# Altium PCB solarlipocharger.PcbDoc
Units mm, origin at the board's own origin, x right, y up, seen from the top; angles counter-clockwise.
Board outline 52.7 x 22.73 mm, 2 copper layers (Top Layer, Bottom Layer); 23 components, 14 nets, 67 pads, 111 vias.
Unrouted connection lines stored in the file: 15.
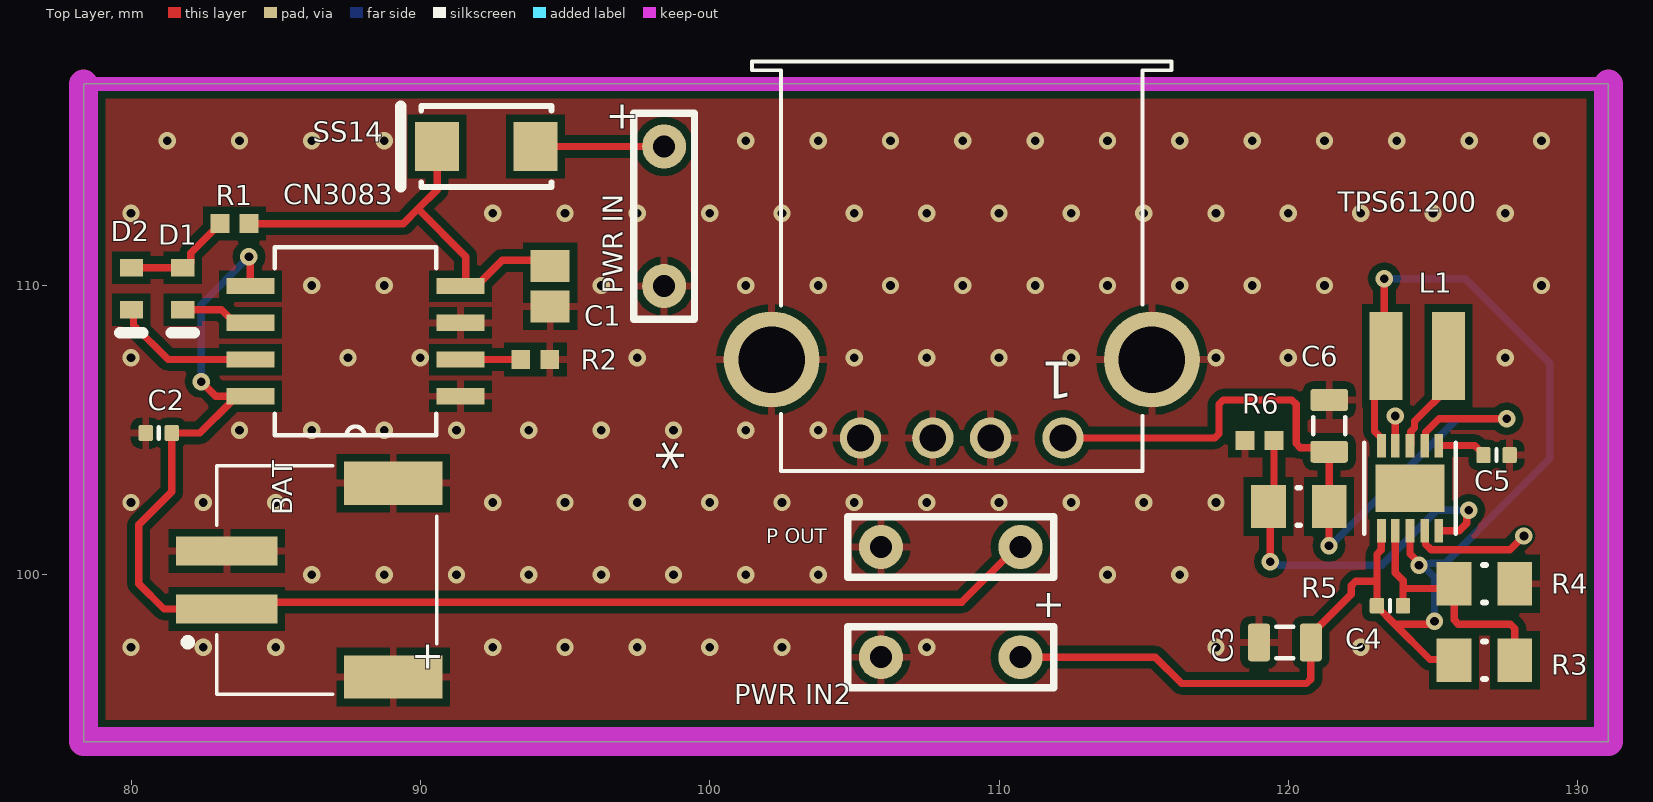
[diagram p0: Top Layer view]
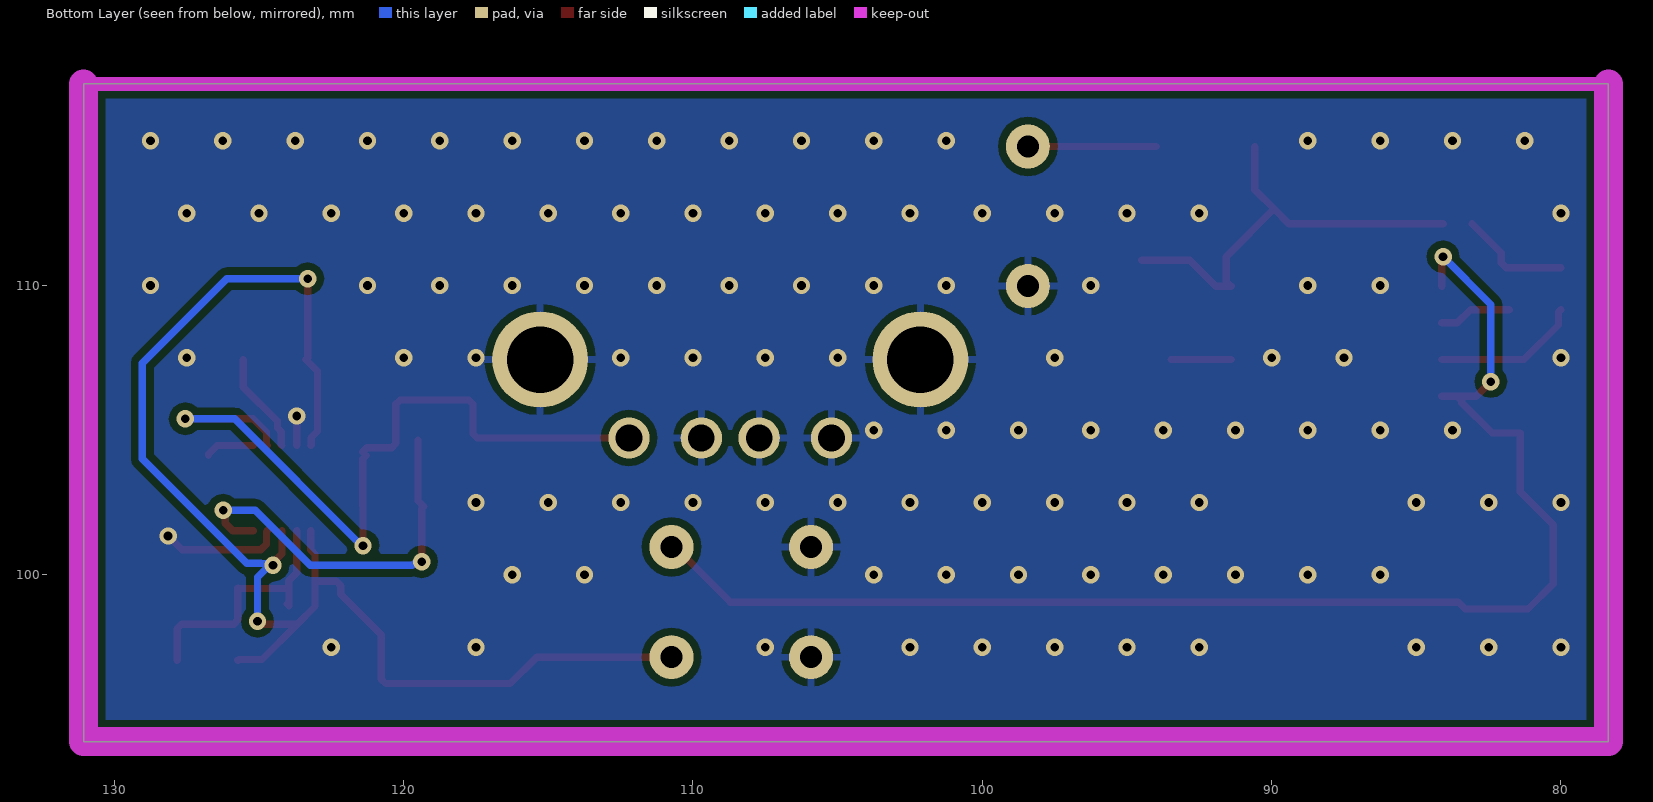
[diagram p1: Bottom Layer view, seen from below]
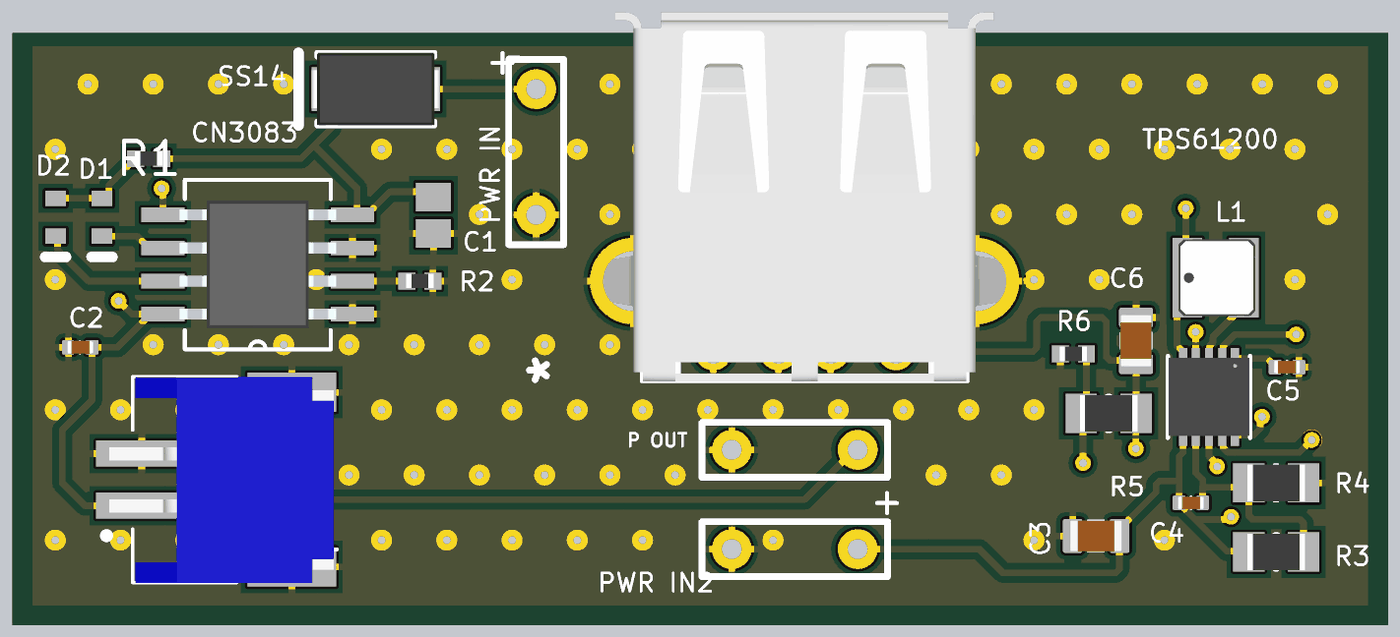
[diagram p2: 3D render of the assembled board from above, using the file's embedded part models]

## Layer stack, top to bottom
Top Solder: solder mask 0.0102, Solder Resist, Dk 3.5
Top Layer: signal copper 0.0356
Dielectric 1: dielectric 0.32, FR-4, Dk 4.8
Bottom Layer: signal copper 0.0356
Bottom Solder: solder mask 0.0102, Solder Resist, Dk 3.5

## Board outline
78.359,94.234 131.064,94.234 131.064,116.967 78.359,116.967

## Design rules (kind name [scope] priority, off if disabled: settings)
Clearance [All] p1: gap=0.254 ignorepadtopadclearanceinfootprint=FALSE except(0: Arc-Hole Track-Hole SMDPad-Hole THPad-Hole Via-Hole Fill-Hole Poly-Hole Region-Hole Text-Hole; 0.127: Arc-Arc Arc-Track Arc-SMDPad Track-Track Track-SMDPad SMDPad-SMDPad)
PolygonConnect [All] p1: connectstyle=Relief reliefconductorwidth=0.254 reliefentries=4 polygonreliefangle="90 Angle" airgapwidth=0.254
RoutingVias [All] p1: holewidth=0.3 width=1.27 viastyle="Through Hole" minholewidth=0.3 minwidth=0.6 maxholewidth=0.711 maxwidth=0.6
SolderMaskExpansion [All] p1: expansion=0.102 istentingtop=FALSE
Width [All] p1: maxlimit=0.254 minlimit=0.254 preferedwidth=0.254
30 further rules are at their usual default settings.

## Components (designator, comment, footprint, x,y, rotation, side; value= is the part's Value field where it differs from the comment)
* "USB A FEMALE" "USB A FEMALE" 108.585,111.76 r180 top
BAT "BAT" BAT 87.122,99.822 r90 top
C1 "08056D226MAT2A" CAPC2013X140X50LL20T25 94.488,109.971 r270 top
C2 "4.7 uF" "CAPACITOR 0402" 80.957,104.902 r180 top
C3 "10 uF" "CAPACITOR 0805" 119.877,97.663 r180 top
C4 "0.1 uF" "CAPACITOR 0402" 123.513,98.933 r0 top
C5 "0.1 uF" "CAPACITOR 0402" 127.196,104.14 r0 top
C6 "22 uF" "CAPACITOR 0805" 121.412,105.155 r90 top
CN3083 "CN3038" CN3083 87.757,108.204 r180 top
D1 "GREEN" "DIODE 0603" 81.788,109.892 r270 top
D2 "RED" "DIODE 0603" 80.01,109.892 r270 top
L1 "4.7 uF 1.2A" LPS3015 124.46,107.569 r0 top
"P OUT" "PWR OUT" PWR 108.331,100.965 r180 top
"PWR IN" "SOLAR PWR IN" PWR 98.425,112.395 r270 top
"PWR IN2" "BAT IN" PWR 108.331,97.155 r180 top
R1 "330" "RESISTOR 0402" 83.574,112.141 r180 top
R2 "3.6k" "RESISTOR 0402" 93.972,107.442 r0 top
R3 "2M" "RESISTOR 0805" 126.78,97.051 r0 top
R4 "220k" "RESISTOR 0805" 126.78,99.695 r0 top
R5 "2M" "RESISTOR 0805" 120.362,102.362 r180 top
R6 "220k" "RESISTOR 0402" 119.007,104.648 r180 top
SS14 "SS14 Diode" SS14 92.292,114.802 r180 top
TPS61200 "TPS61200" TPS61200 124.206,102.997 r270 top

## Footprints (in the part's own frame and the unit in brackets; to place one, negate y for a bottom-side part, rotate by r counter-clockwise, add the part's x,y. Pads: shape width x height; smd on the part's side, far side on the other; paste and mask are expansions set on the pad)
BAT [mm]
  rect 1x3.5 smd: 1(-1,3.81) 2(1,3.81)
  rect 1.5x3.4 smd: S1(-3.35,-1.94) S2(3.35,-1.94)
  silkscreen extent -3.95,-3.44 3.95,5.26, body extent -3.96,-3.54 3.94,5.06, height 5.5
"CAPACITOR 0402" [mm]
  rrect25% 0.5x0.55 smd: 1(-0.45,0) 2(0.45,0)
  silkscreen extent 0,-0.2 0,0.2, body extent -0.5,-0.25 0.5,0.25, height 0.6
"CAPACITOR 0805" [mm]
  rrect25% 0.76x1.3 smd: 1(-0.9,0) 2(0.89,0)
  silkscreen extent -0.3,-0.55 0.3,0.55, body extent -1,-0.6 1,0.6, height 1.45
CAPC2013X140X50LL20T25 [mm] "Chip Capacitor, 2-Leads, Body 2.00x1.25mm, IPC High Density"
  rect 1.1x1.35 smd: 1(-0.7,0) 2(0.7,0)
  body extent -1.1,-0.72 1.1,0.72, height 1.4
CN3083 [mil]
  rect 65x22 smd: 1(-143,80) 2(-143,30) 3(-143,-20) 4(-143,-70) 5(143,-70) 6(143,-20) 7(143,30) 8(143,80)
  silkscreen extent -110,-123 110,133, body extent -118,-91 118,101, height 69
"DIODE 0603" [mm]
  rect 0.6x0.8 smd: 1(-0.725,0) 2(0.725,0)
  silkscreen extent 1.53,-0.4 1.53,0.4, body extent -0.8,-0.4 0.8,0.4, height 0.65
LPS3015 [mm]
  rect 1.14x3.05 smd: 1(-1.08,0) 2(1.08,0)
  body extent -1.43,-1.47 1.52,1.47, height 1.4
PWR [mil]
  round 60 hole 30: 1(-95,0) 2(95,0)
  silkscreen extent -140,-41 140,41
"RESISTOR 0402" [mm]
  rect 0.65x0.65 smd: 1(-0.5,0) 2(0.5,0)
  body extent -0.53,-0.28 0.53,0.28, height 0.4
"RESISTOR 0805" [mm]
  rect 1.2x1.5 smd: 1(-1.05,0) 2(1.05,0)
  silkscreen extent -0.05,-0.65 0.05,0.65, body extent -1.1,-0.7 1.1,0.7, height 0.5
SS14 [mm]
  rect 1.52x1.68 smd: 1(-1.688,-0.006) 2(1.712,-0.006)
  silkscreen extent -2.24,-1.41 2.97,1.39, body extent -2.46,-1.4 2.48,1.39, height 2.29
TPS61200 [mil]
  rect 32x12 smd: 1(-58,39) 2(-58,20) 3(-58,0) 4(-58,-20) 5(-58,-39) 6(58,-39) 7(58,-20) 8(58,0) 9(58,20) 10(58,39)
  rect 65x94 smd: 11(0,0)
  silkscreen extent -62,-62 62,62, body extent -59,-61 59,61, height 39
"USB A FEMALE" [mm]
  round 1.428 hole 0.92: 1(-3.627,7.028) 2(-1.127,7.028) 3(0.873,7.028) 4(3.373,7.028)
  round 3.316 hole 2.3: SHELL(-6.697,4.318) SHELL1(6.443,4.318)
  silkscreen extent -7.38,-5.98 7.12,8.17, body extent -7.98,-5.99 7.72,8.16, height 4.2

## Part data
C1: library part CMP-001-00083-1, "AVX         08056D226MAT2A.            CERAMIC CAPACITOR, 22UF, 6.3V, X5R, 20%, 0805, FULL REEL", Capacitance=22uF, Case Code (Imperial)=0805, Case Code (Metric)=2012, Dielectric=X5R, Dielectric Material=Ceramic, Insulation Resistance=10GR, Max Operating Temperature=85°C, Min Operating Temperature=-55°C, Package Quantity=1, Tolerance=20%, Voltage=6.3V, Case/Package=0805, Depth=1.25mm, Dissipation Factor=12.5%, Height=1.4mm, Lead Free="Lead Free", Length=2.01mm, Mount="Surface Mount,PCB", Number of Pins=2, Packaging="Tape and Reel", Radiation Hardening=No, REACH SVHC="No SVHC", RoHS Compliant=Yes, Termination=SMD/SMT, Thickness=0.055inch, Voltage Rating=6.3V, Voltage Rating (DC)=6.3V, Width=0.049inch
C2 C4 C5: library part "Capacitor 0402"
C3 C6: library part "Capacitor 0805"
D1 D2: library part "Diode 0603"
L1: library part Inductor, "LPS3015 - 222MRB"
"PWR IN2": library part "SOLAR PWR IN"
R1 R2 R6: library part "Resistor 0402"
R3 R4 R5: library part "Resistor 0805"

## Via types
v1: diameter 0.6, hole 0.3, Top Layer to Bottom Layer, 111 vias

## Nets (pads, with @x,y where several pads share a name; then routed paths per layer and width w, separated by ;. In a path a pad name is that pad's centre, name@x,y a point inside that pad or via, vN(x,y) a via of type N, cw(c..) or ccw(c..) an arc to the next point about the centre after c; other vN are vias at no path point)
GND: "P OUT.2" "PWR IN2.2" "PWR IN.2" *.2 *.3 *.4 *.SHELL *.SHELL1 BAT.2 BAT.S1 BAT.S2 C1.2 C2.2 C3.2 C5.2 C6.2 CN3083.1 CN3083.3 R2.2 R4.2 R6.2 TPS61200.4 TPS61200.9 | length 5.2
  Top Layer w0.254: TPS61200.4 v1(123.698,105.49) ; TPS61200.9 124.739,101.498 124.739,101.063 124.939,100.863 127.66,100.863 v1(128.143,101.346)
  other v1: 80,97.5 82.5,97.5 85,97.5 92.5,97.5 95,97.5 97.5,97.5 100,97.5 102.5,97.5 107.5,97.5 117.5,97.5 122.5,97.5 86.25,100 88.75,100 91.25,100 93.75,100 96.25,100 98.75,100 101.25,100 103.75,100 113.75,100 116.25,100 80,102.5 82.5,102.5 85,102.5 92.5,102.5 95,102.5 97.5,102.5 100,102.5 102.5,102.5 105,102.5 107.5,102.5 110,102.5 112.5,102.5 115,102.5 117.5,102.5 83.75,105 86.25,105 88.75,105 91.25,105 93.75,105 96.25,105 98.75,105 101.25,105 103.75,105 80,107.5 87.5,107.5 90,107.5 97.5,107.5 105,107.5 107.5,107.5 110,107.5 112.5,107.5 117.5,107.5 120,107.5 127.5,107.5 86.25,110 88.75,110 96.25,110 101.25,110 103.75,110 106.25,110 108.75,110 111.25,110 113.75,110 116.25,110 118.75,110 121.25,110 128.75,110 80,112.5 92.5,112.5 95,112.5 97.5,112.5 100,112.5 102.5,112.5 105,112.5 107.5,112.5 110,112.5 112.5,112.5 115,112.5 117.5,112.5 120,112.5 122.5,112.5 125,112.5 127.5,112.5 81.25,115 83.75,115 86.25,115 88.75,115 101.25,115 103.75,115 106.25,115 108.75,115 111.25,115 113.75,115 116.25,115 118.75,115 121.25,115 123.75,115 126.25,115 128.75,115
Net*_1: *.1 C6.1 R5.1 TPS61200.2 | length 26.5
  Top Layer w0.254: *.1 117.453,104.732 117.602,104.881 117.602,105.896 117.751,106.045 120.12,106.045 120.269,105.896 120.269,104.543 120.418,104.394 121.273,104.394 C6.1 ; C6.1@121.285,104.128 121.412,104.002 R5.1 121.404,102.354 v1(121.404,101.011) ; TPS61200.2 124.739,104.496 124.739,104.931 124.939,105.131 124.943,105.131 125.208,105.396 v1(127.546,105.396)
  Bottom Layer w0.254: v1(121.404,101.011) 121.455,101.011 125.84,105.396 v1(127.546,105.396)
NetBAT_1: "P OUT.1" BAT.1 C2.1 CN3083.5 CN3083.8 | length 48.1
  Top Layer w0.254: v1(82.423,106.68) 82.931,106.172 CN3083.8@83.579,106.172 ; v1(84.074,110.998) 84.125,110.947 CN3083.5 ; CN3083.8 CN3083.8@83.579,106.172 ; 110.744,100.965 110.617,100.965 108.712,99.06 83.55,99.06 BAT.1 81.137,98.822 80.264,99.695 80.264,101.727 81.407,102.87 C2.1 82.379,104.902 83.426,105.949 83.426,106.02 CN3083.8@83.579,106.172
  Bottom Layer w0.254: v1(82.423,106.68) 82.423,109.347 v1(84.074,110.998)
NetC1_1: C1.1 CN3083.4 R1.1 SS14.2 | length 15.4
  Top Layer w0.254: R1.1 89.408,112.141 89.916,112.649 ; SS14.2 90.58,113.313 89.916,112.649 ; CN3083.4 CN3083.4@91.415,109.982 ; C1.1@94.488,110.871 92.824,110.871 91.935,109.982 CN3083.4@91.415,109.982 ; 89.916,112.649 91.567,110.998 91.567,110.134 CN3083.4@91.415,109.982
NetC3_1: "PWR IN2.1" C3.1 C4.1 L1.1 R3.1 TPS61200.5 TPS61200.6 TPS61200.8 | length 48.6
  Top Layer w0.254: 110.744,97.155 115.403,97.155 116.313,96.244 120.628,96.244 120.777,96.393 C3.1 120.777,97.933 122.174,99.33 122.174,99.627 122.323,99.776 123.063,99.776 ; TPS61200.6 123.215,100.863 123.063,100.711 123.063,99.776 ; TPS61200.5 123.19,104.496 123.19,104.75 122.981,104.959 122.981,107.043 123.38,107.442 123.317,107.505 v1(123.317,110.236) ; TPS61200.8 124.206,100.733 124.516,100.423 v1(124.516,100.33) ; v1(125.051,98.397) 124.985,98.33 124.873,98.33 124.834,98.291 123.68,98.291 ; R3.1 125.708,97.073 124.898,97.073 123.68,98.291 ; 123.063,99.776 C4.1 123.063,98.908 123.68,98.291
  Bottom Layer w0.254: v1(123.317,110.236) 126.111,110.236 129.032,107.315 129.032,104.013 125.424,100.405 124.943,100.405 124.934,100.396 124.582,100.396 v1(124.516,100.33) ; v1@124.576,100.392 125.051,99.917 v1(125.051,98.397)
NetC4_2: C4.2 R3.2 R4.1 TPS61200.7 | length 9
  Top Layer w0.254: TPS61200.7 123.698,100.076 123.974,99.8 123.974,99.59 123.963,99.579 123.963,99.529 ; C4.2@124.024,98.994 C4.2 123.963,99.529 ; R3.2 127.83,98.149 127.681,98.298 125.879,98.298 125.73,98.447 125.73,99.545 125.714,99.529 123.963,99.529
NetC5_1: C5.1 TPS61200.1 | length 1.7
  Top Layer w0.254: TPS61200.1 126.441,104.47 126.746,104.165 C5.1
NetCN3083_2: CN3083.2 R2.1 | length 2.1
  Top Layer w0.254: CN3083.2 R2.1
NetCN3083_6: CN3083.6 D1.2 | length 2.5
  Top Layer w0.254: D1.2 83.124,109.167 83.579,108.712 CN3083.6
NetCN3083_7: CN3083.7 D2.2 | length 5.1
  Top Layer w0.254: D2.2 80.087,109.09 80.087,108.635 81.28,107.442 CN3083.7
NetD1_1: D1.1 D2.1 R1.2 | length 3.9
  Top Layer w0.254: D2.1 D1.1 81.888,110.617 82.061,110.79 82.061,111.128 R1.2
NetL1_2: L1.2 TPS61200.3 | length 3.5
  Top Layer w0.254: TPS61200.3 124.231,104.496 124.231,104.951 124.361,105.081 124.361,105.308 125.54,106.487 L1.2@125.54,107.442
"NetPWR IN_1": "PWR IN.1" SS14.1 | length 4.4
  Top Layer w0.254: SS14.1 98.425,114.808
NetR5_2: R5.2 R6.1 TPS61200.10 | length 13.6
  Top Layer w0.254: v1(119.38,100.457) 119.38,102.294 R5.2 119.507,102.557 R6.1 ; TPS61200.10 125.908,101.524 126.172,101.788 126.172,102.169 v1(126.238,102.235)
  Bottom Layer w0.254: v1(119.38,100.457) 119.446,100.391 119.641,100.391 119.702,100.33 123.228,100.33 125.133,102.235 v1(126.238,102.235)
pads on no net: TPS61200.11

## Polygon pours and split planes (outlines as drawn)
GND on Top Layer "TOPLAYERGND" (solid, pour order 16): 78.359,94.234 131.064,94.234 131.064,116.967 78.359,116.967
GND on Bottom Layer "BOTTOMLAYERGND" (solid, pour order 17): 78.359,94.234 131.064,94.234 131.064,116.967 78.359,116.967

## Keep-outs
Keep-Out Layer:
  lines w0.5: 78.359,94.234 78.359,116.967 ; 78.359,94.234 131.064,94.234 ; 78.359,94.234 78.359,116.967 ; 78.359,94.234 131.064,94.234 ; 78.359,116.967 131.064,116.967 ; 131.064,94.234 131.064,116.967 ; 131.064,94.234 131.064,116.967
  lines w1: 78.359,116.967 78.359,94.234 131.064,94.234 131.064,116.967

## Silkscreen, mask and mechanical layers (free items; w line width, h text height)
Top Overlay:
  text "+" at 96.416,115.426 h1
  text "+" at 111.148,98.535 h1
  text "+" at 89.685,96.757 h1

## Text inside footprints (layer, text, board x,y; h text height)
*: Top Overlay "1" at 112.562,107.372 h1.27 r180; Mechanical 13 "4" at 105.872,107.392 h1.27 r180; Mechanical 13 "1" at 112.572,107.372 h1.27 r180